# Altium PCB mikro.PcbDoc
Units mm, origin at the board's own origin, x right, y up, seen from the top; angles counter-clockwise.
Board outline 86.61 x 97.54 mm, 2 copper layers (Top Layer, Bottom Layer); 14 components, 16 nets, 76 pads, 2 vias.
Unrouted connection lines stored in the file: 1.
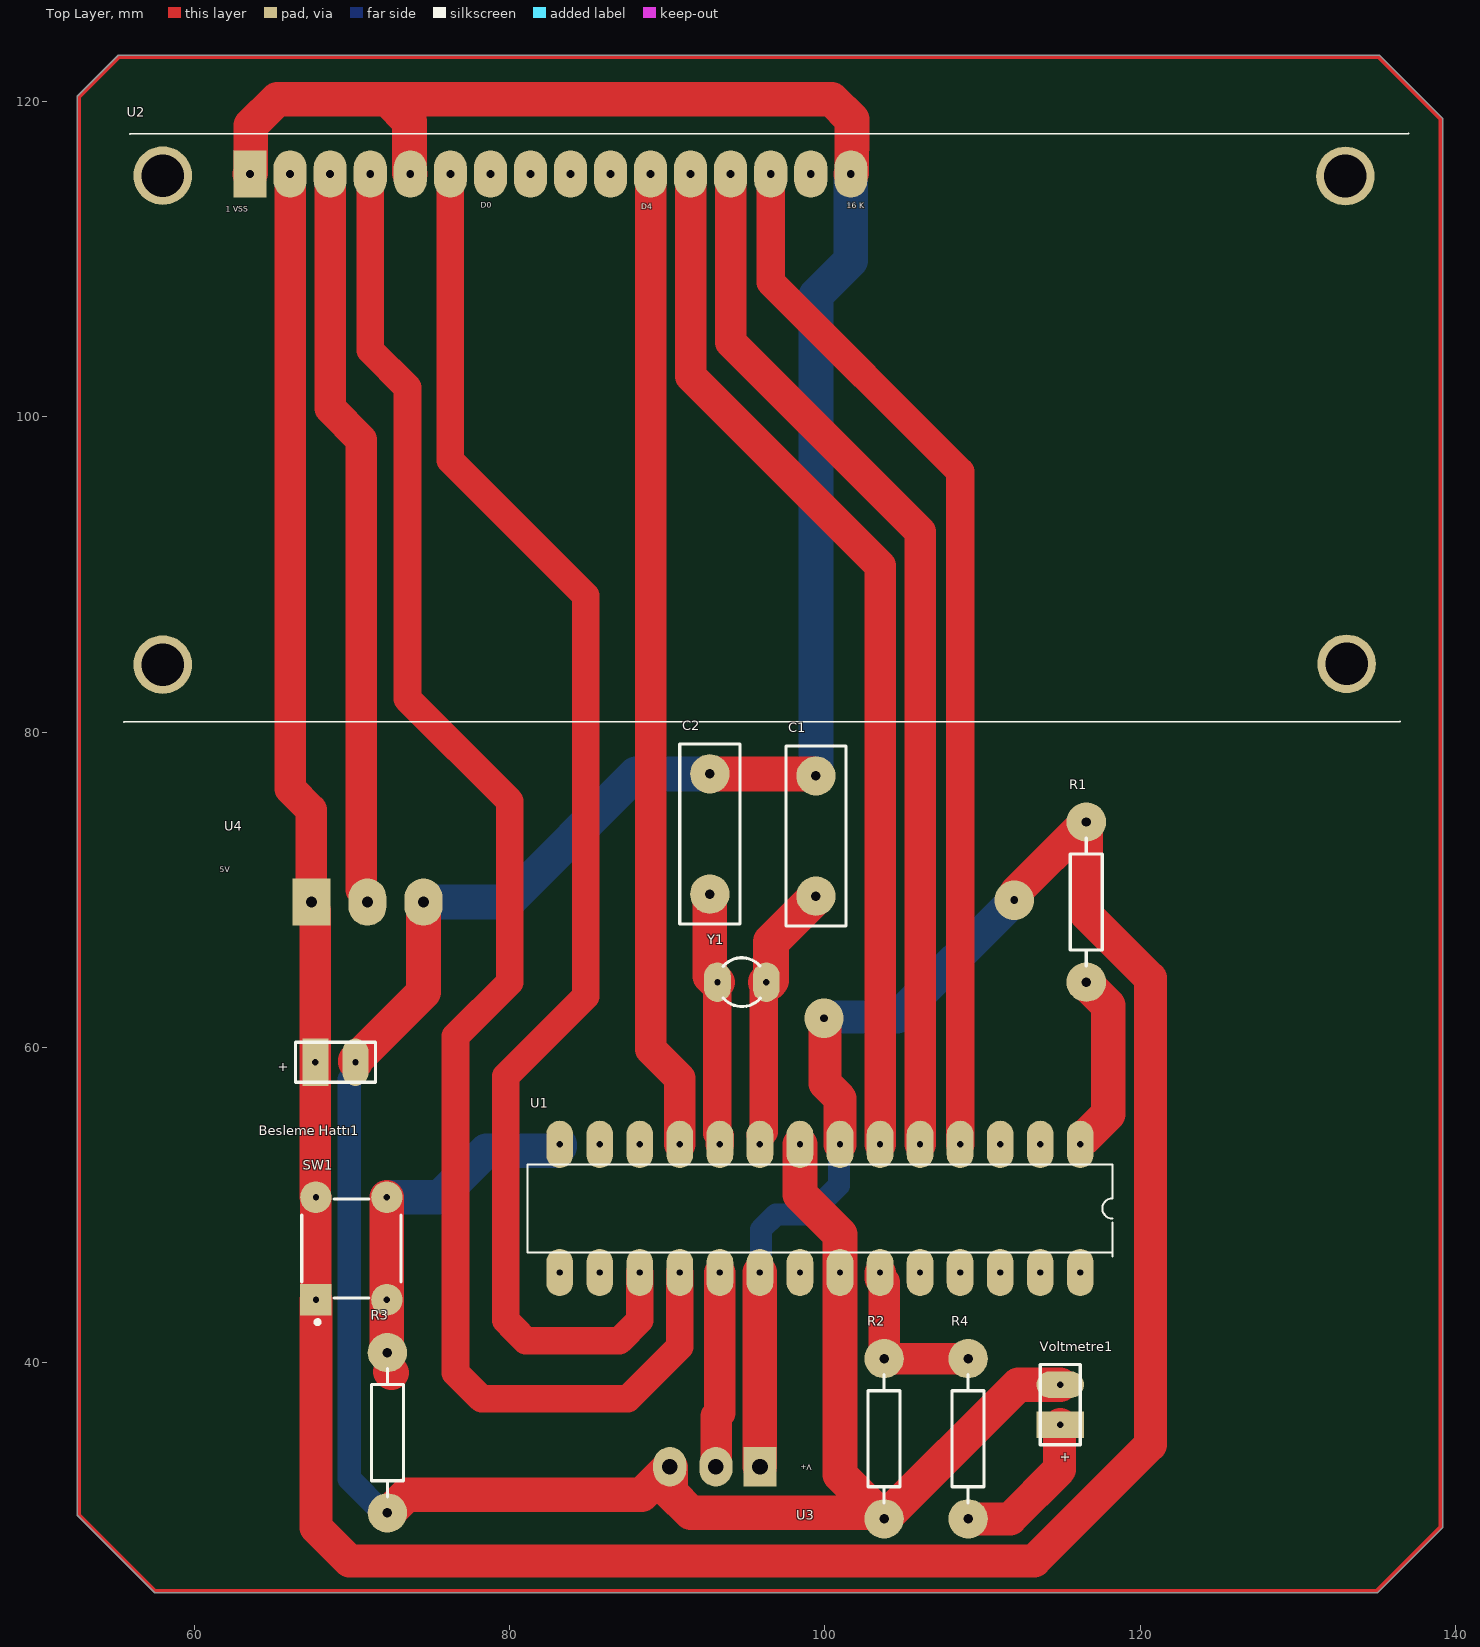
[diagram p0: Top Layer view]
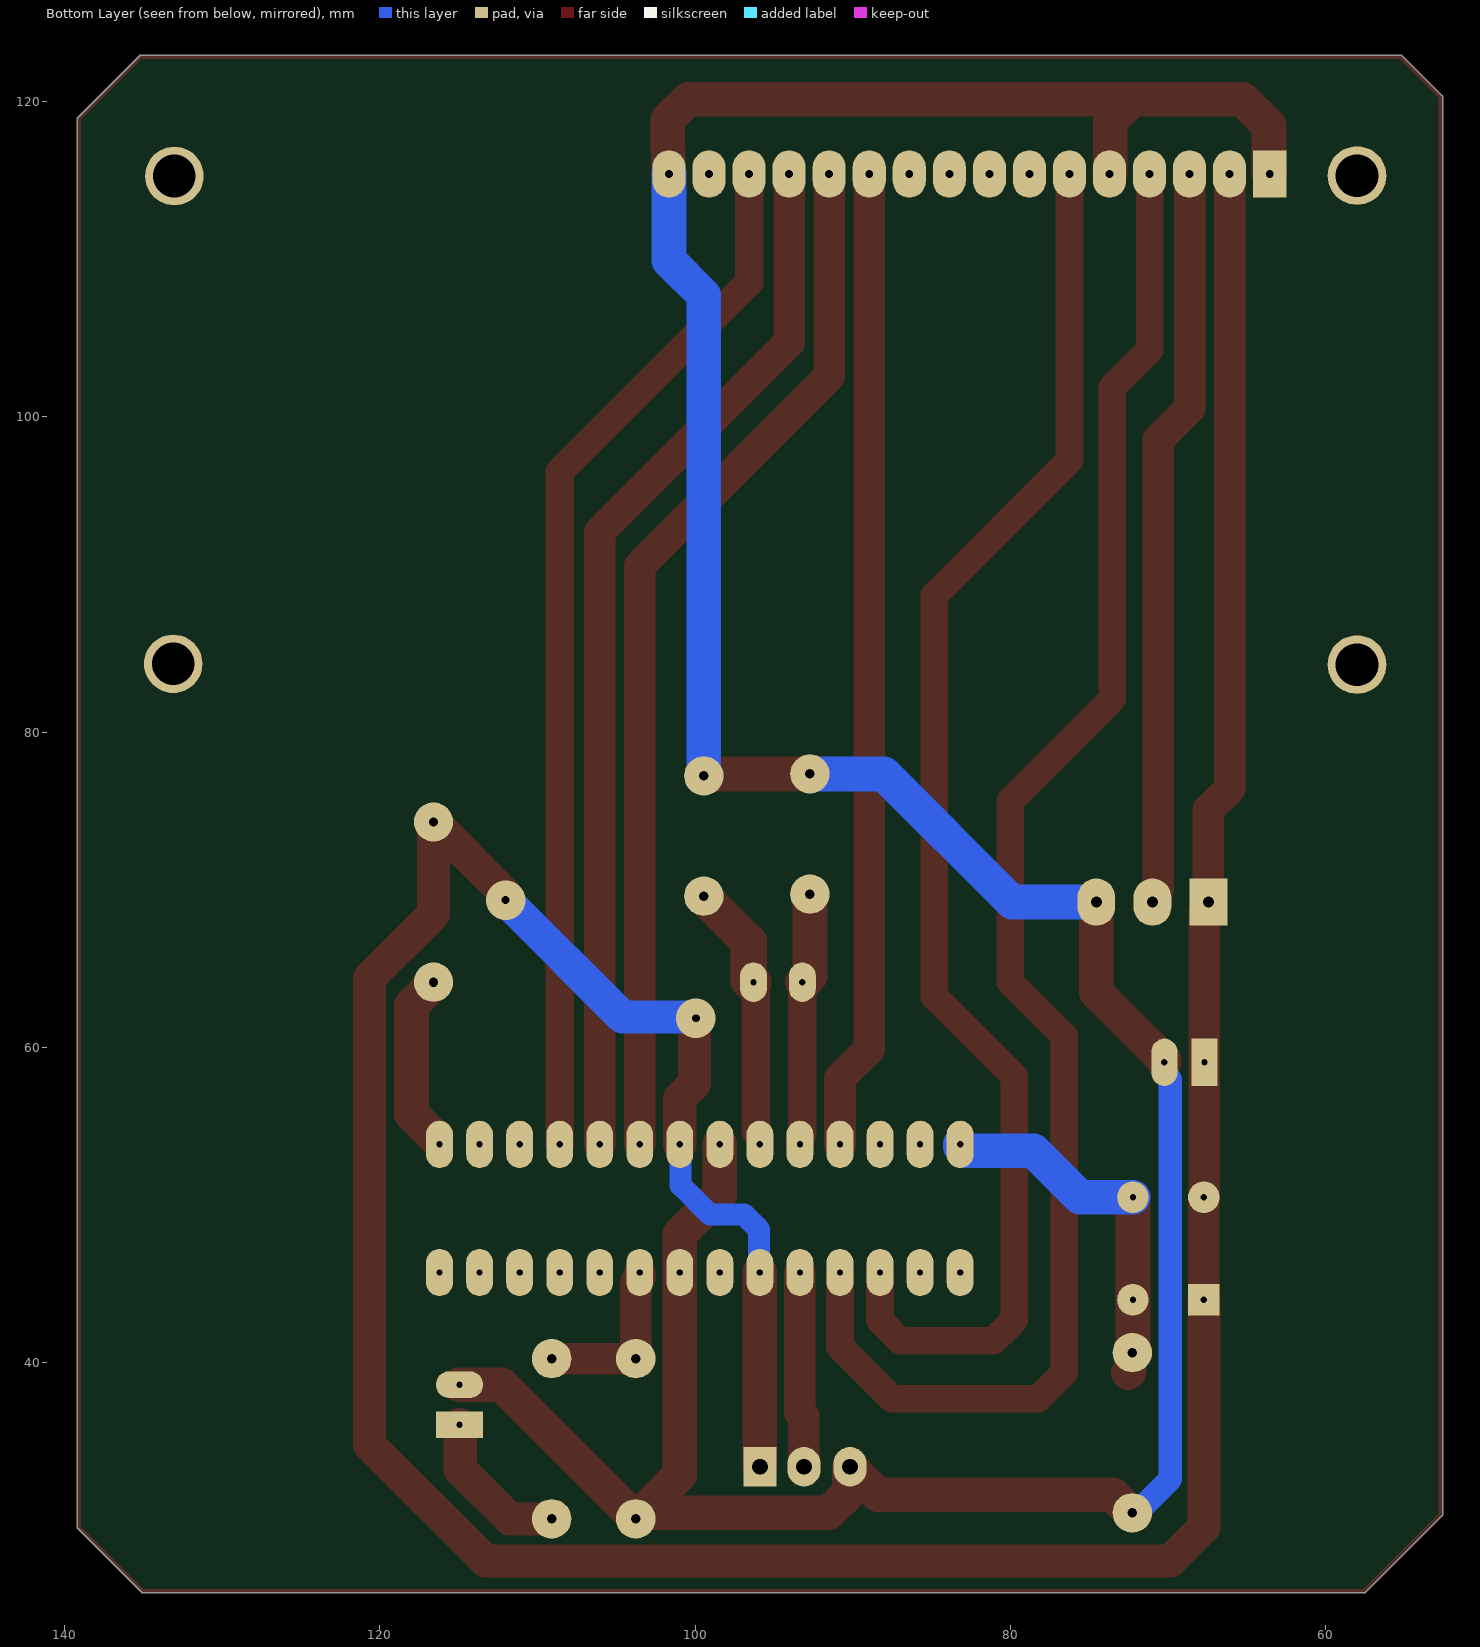
[diagram p1: Bottom Layer view, seen from below]

## Layer stack, top to bottom
Top Solder: solder mask 0.0102, Solder Resist, Dk 3.5
Top Layer: signal copper 0.0356
Dielectric 1: dielectric 0.32, FR-4, Dk 4.8
Bottom Layer: signal copper 0.0356
Bottom Solder: solder mask 0.0102, Solder Resist, Dk 3.5

## Board outline
52.578,30.353 cw(c52.705,30.353) 52.578,30.366 ccw(c52.705,30.378) 52.615,30.288 57.466,25.437 ccw(c57.556,25.527) 57.544,25.4 ccw(c57.556,25.527) 57.556,25.4 57.544,25.4 cw(c57.531,25.527) 57.531,25.4 135.001,25.4 ccw(c135.001,25.527) 135.092,25.437 135.091,25.437 139.155,29.501 139.155,29.5 ccw(c139.065,29.591) 139.192,29.591 139.192,118.872 ccw(c139.065,118.872) 139.155,118.963 139.155,118.962 135.218,122.899 135.219,122.899 ccw(c135.128,122.809) 135.128,122.936 55.246,122.936 ccw(c55.245,122.809) 55.245,122.936 135.128,122.936 55.246,122.936 55.245,122.936 ccw(c55.245,122.809) 55.154,122.899 ccw(c55.245,122.809) 55.154,122.898 55.155,122.899 52.615,120.359 55.155,122.899 52.743,120.487 ccw(c52.832,120.396) 52.742,120.487 ccw(c52.832,120.396) 52.742,120.486 ccw(c52.832,120.396) 52.741,120.486 ccw(c52.832,120.396) 52.741,120.485 52.616,120.36 ccw(c52.705,120.269) 52.615,120.36 ccw(c52.705,120.269) 52.578,120.269 ccw(c52.705,120.269) 52.578,120.269 ccw(c52.705,120.269) 52.578,120.269

## Design rules (kind name [scope] priority, off if disabled: settings)
Clearance [All] p1: gap=0.127 ignorepadtopadclearanceinfootprint=FALSE except(0: Arc-Hole Track-Hole SMDPad-Hole THPad-Hole Via-Hole Fill-Hole Poly-Hole Region-Hole Text-Hole)
HoleSize [All] p1: absolutevalues=TRUE maxlimit=4 minlimit=0.025 maxpercent=80.000 minpercent=20.000
HoleToHoleClearance [All] p1: gap=0.152 allowstackedmicrovias=TRUE
PolygonConnect [All] p1: connectstyle=Relief reliefconductorwidth=0.254 reliefentries=4 polygonreliefangle="90 Angle" airgapwidth=0.254
RoutingVias [All] p1: holewidth=0.711 width=1.27 viastyle="Through Hole" minholewidth=0.3 minwidth=0.3 maxholewidth=4 maxwidth=6
SolderMaskExpansion [All] p1: expansion=0.06 istentingtop=FALSE
Width [All] p1: maxlimit=6 minlimit=0.254 preferedwidth=3 minimp=50.000000 maximp=50.000000 favimp=50.000000
28 further rules are at their usual default settings.

## Components (designator, comment, footprint, x,y, rotation, side; value= is the part's Value field where it differs from the comment)
"Besleme Hattı1" "Battery" BAT-2#1 68.961,59.055 r0 top
C1 "22pF" RAD-0.3 99.441,73.406 r270 top
C2 "22pF" RAD-0.3 92.71,73.533 r270 top
R1 "res" AXIAL-0.4 116.586,69.215 r270 top value=10K
R2 "res" AXIAL-0.4 103.759,35.179 r270 top value=5K
R3 "res" AXIAL-0.4 72.263,35.56 r90 top value=330R
R4 "res" AXIAL-0.4 109.093,35.179 r90 top value=10K
SW1 "buton" FP-1825910-2-0 69.977,47.244 r90 top
U1 "atmega328p" atmega328p 99.568,49.784 r270 top
U2 "16x2 LCD" "16x2 LCD" 95.529,95.225 r0 top
U3 "DHT11" DHT11 93.472,33.401 r180 top
U4 "pot 10k" "pot 10k" 70.993,69.215 r0 top
Voltmetre1 "Volmetre" BAT-2#2 114.935,37.338 r90 top
Y1 "16MHz" R38 94.742,64.135 r270 top

## Footprints (in the part's own frame and the unit in brackets; to place one, negate y for a bottom-side part, rotate by r counter-clockwise, add the part's x,y. Pads: shape width x height; smd on the part's side, far side on the other; paste and mask are expansions set on the pad)
"16x2 LCD" [mm]
  rect 2.1x3 hole 0.5 mask+0.05: 1(-31.979,20.168)
  oval 2.1x3 hole 0.5 mask+0.05: 2(-29.439,20.168) 3(-26.899,20.168) 4(-24.359,20.168) 5(-21.819,20.168) 6(-19.279,20.168) 7(-16.739,20.168) 8(-14.199,20.168) 9(-11.659,20.168) 10(-9.119,20.168) 11(-6.579,20.168) 12(-4.039,20.168) 13(-1.499,20.168) 14(1.041,20.168) 15(3.581,20.168) 16(6.121,20.168)
  round 3.716 hole 2.7: 17(-37.516,20.066) 18(37.49,20.041) 19(-37.516,-10.947) 20(37.567,-10.897)
  silkscreen extent -39.98,-14.58 41.5,22.73, body extent -39.98,-13.45 40.02,22.55, height 10.6
atmega328p [mm]
  oval 3x1.7 hole 0.4: 1(-4.064,16.637) 2(-4.064,14.097) 3(-4.064,11.557) 4(-4.064,9.017) 5(-4.064,6.477) 6(-4.064,3.937) 7(-4.064,1.397) 8(-4.064,-1.143) 9(-4.064,-3.683) 10(-4.064,-6.223) 11(-4.064,-8.763) 12(-4.064,-11.303) 13(-4.064,-13.843) 14(-4.064,-16.383) 15(4.064,-16.383) 16(4.064,-13.843) 17(4.064,-11.303) 18(4.064,-8.763) 19(4.064,-6.223) 20(4.064,-3.683) 21(4.064,-1.143) 22(4.064,1.397) 23(4.064,3.937) 24(4.064,6.477) 25(4.064,9.017) 26(4.064,11.557) 27(4.064,14.097) 28(4.064,16.637)
  silkscreen extent -2.79,-18.41 3.05,18.67, body extent -5.08,-17.14 5.08,17.53, height 4.57
AXIAL-0.4 [mm] "Axial Device, Thru-Hole; 2 Leads; 0.4 in Pin Spacing"
  round 2.5 hole 0.6: 1(-5.08,0) 2(5.08,0)
  silkscreen extent -4.06,-1.02 4.06,1.02
BAT-2#1 [mm] "Battery; 2 Leads"
  rect 1.65x3 hole 0.4: 1(-1.27,0)
  oval 1.65x3 hole 0.4: 2(1.27,0)
  silkscreen extent -2.54,-1.27 2.54,1.27
BAT-2#2 [mm] "Battery; 2 Leads"
  rect 1.7x3 hole 0.4: 1(-1.27,0)
  oval 1.7x3 hole 0.4: 2(1.27,0)
  silkscreen extent -2.54,-1.27 2.54,1.27
DHT11 [mm]
  rect 2.1x2.5 hole 1: 1(-2.413,0)
  oval 2.1x2.5 hole 1: 2(0.381,0) 3(3.302,0)
  body extent -6.87,-6.8 7.63,1.72, height 4.33
FP-1825910-2-0 [mm]
  rect 2x2 hole 0.4 paste-1000 mask+0: 1(-3.25,2.25)
  round 2 hole 0.4 paste-1000 mask+0: 2(3.25,2.25) 3(-3.25,-2.25) 4(3.25,-2.25)
  silkscreen extent -4.79,-3.15 3.15,3.15, body extent -4.12,-3.24 4.12,3.24, height 0.25
"pot 10k" [mm]
  rect 2.4x3 hole 0.7: 1(-3.556,0)
  oval 2.4x3 hole 0.7: 2(0,0) 3(3.556,0)
R38 [mm] "Crystal, Thru-Hole; 2 Leads; Body 3.1 x 8.2 mm (Dia.xH)"
  oval 2.5x1.7 hole 0.4: 1(0,1.55) 2(0,-1.55)
  silkscreen extent -1.55,-1.19 1.55,1.17
RAD-0.3 [mm] "Radial Cap, Thru-Hole; 2 Leads; 0.3 in Pin Spacing"
  round 2.5 hole 0.6: 1(-3.81,0) 2(3.81,0)
  silkscreen extent -5.71,-1.91 5.71,1.91

## Part data
"Besleme Hattı1": "Multicell Battery", LatestRevisionDate=17-Jul-2002, LatestRevisionNote="Re-released for DXP Platform.", PackageDescription="Battery; 2 Leads", PackageReference=BAT-2, Published=24-Mar-1999, Publisher="Altium Limited"
C1 C2: library part Cap, "Capacitor", LatestRevisionDate=17-Jul-2002, LatestRevisionNote="Re-released for DXP Platform.", PackageDescription="Radial Cap, Thru-Hole; 2 Leads; 0.3 in Pin Spacing", PackageReference=RAD-0.3, Published=8-Jun-2000, Publisher="Altium Limited"
R1 R2 R3 R4: library part Res2, "Resistor", LatestRevisionDate=17-Jul-2002, LatestRevisionNote="Re-released for DXP Platform.", PackageDescription="Axial Device, Thru-Hole; 2 Leads; 0.4 in Pin Spacing", PackageReference=AXIAL-0.4, Published=8-Jun-2000, Publisher="Altium Limited"
SW1: library part CMP-03407-000004-1, "SWITCH TACTILE SPST-NO 0.05A 24V", Contact Current Rating=50mA, Contact Resistance=100mΩ, Manufacturer=TE, Manufacturer Part Number=1825910-2, Operating Force=160gf, Package=0, Temperature="-35°C to +85°C", Temperature Range High=+85°C, Temperature Range Low=-35°C, Voltage Rating Dc=24V, Automotive=No, Category=Switch, ComponentLink2Description=Datasheet, ComponentLink2URL=https://www.te.com/commerce/DocumentDelivery/DDEController?Action=showdoc&DocId=Customer+Drawing%7F1825910%7FC10%7Fpdf%7FEnglish%7FENG_CD_1825910_C10.pdf%7F1825910-2, Device Class L1=Electromechanical, Device Class L2=Switches, Device Class L3="Tactile Switches", Digikey Description="SWITCH TACTILE SPST-NO 0.05A 24V", Electromechanical Life=100000Cycles, Height=4.6mm, Lead Free=Yes, Mount="Through Hole", Octopart=https://octopart.com/1825910-2-te+connectivity-42270502, RoHS=TRUE, Throw Configuration=SPST-NO
U1: library part Atmega328p
Voltmetre1: library part Battery, "Volmetre ucları", LatestRevisionDate=17-Jul-2002, LatestRevisionNote="Re-released for DXP Platform.", PackageDescription="Battery; 2 Leads", PackageReference=BAT-2, Published=24-Mar-1999, Publisher="Altium Limited"
Y1: library part XTAL, "16MHZ Crystal Oscillator", LatestRevisionDate=17-Jul-2002, LatestRevisionNote="Re-released for DXP Platform.", PackageDescription="Crystal, Thru-Hole; 2 Leads; Body 3.1 x 8.2 mm (Dia.xH)", PackageReference=R38, Published=8-Jun-2000, Publisher="Altium Limited"

## Via types
v1: diameter 2.5, hole 0.5, Top Layer to Bottom Layer, 2 vias

## Nets (pads, with @x,y where several pads share a name; then routed paths per layer and width w, separated by ;. In a path a pad name is that pad's centre, name@x,y a point inside that pad or via, vN(x,y) a via of type N, cw(c..) or ccw(c..) an arc to the next point about the centre after c; other vN are vias at no path point)
+5: "Besleme Hattı1.1" R1.1 SW1.1 SW1.2 U1.7 U1.20 U2.2 U2.15 U3.1 U4.1 | length 238.8
  Top Layer w2: U2.2 66.091,76.403 67.437,75.057 U4.1 67.437,68.915 67.691,68.661 67.691,59.055 67.691,50.53 SW1.2 SW1.1
  Top Layer w2.1: SW1.1 67.727,29.555 69.85,27.432 113.284,27.432 120.65,34.798 120.65,64.389 116.586,68.453 R1.1 112.091,69.8 112.091,69.419 v1(112.014,69.342) ; v1(99.949,61.849) 100.026,61.772 100.026,57.708 100.965,56.769 U1.7
  Top Layer w2.2: U3.1 U1.20
  Bottom Layer w1.4: U1.20 95.942,45.777 95.942,48.444 96.901,49.403 99.06,49.403 100.908,51.251 100.908,53.791 U1.7
  Bottom Layer w2.1: v1(99.949,61.849) 100.026,61.926 104.598,61.926 v1(112.014,69.342)
ButonPin: R3.2 SW1.3 SW1.4 U1.14 | length 22.4
  Top Layer w2.2: SW1.4 SW1.3 72.227,40.676 R3.2 ; R3.2@72.46,39.427 72.517,39.37
  Bottom Layer w2.2: SW1.4 75.581,50.494 78.535,53.448 82.935,53.448 83.185,53.698 U1.14
DHT: U1.19 U3.2 | length 12.4
  Top Layer w2: U3.2 93.11,33.42 93.11,36.595 93.345,36.83 U1.19
GND: "Besleme Hattı1.2" C1.1 C2.1 R2.2 R3.1 U1.8 U1.22 U2.1 U2.5 U2.16 U3.3 U4.3 Voltmetre1.2 | length 236.3
  Top Layer w2.2: U2.1 63.601,115.442 63.601,118.465 65.278,120.142 72.244,120.142 ; 70.231,59.055 70.231,59.18 74.549,63.498 U4.3 ; R3.1 72.344,30.48 73.487,31.623 88.392,31.623 90.02,33.251 90.12,33.251 90.17,33.301 U3.3 90.22,33.351 90.22,31.769 91.509,30.48 103.297,30.48 103.678,30.099 R2.2 ; U2.5 73.661,115.442 73.661,118.725 72.244,120.142 ; C2.1 99.233,77.343 99.36,77.216 C1.1 ; U1.8 98.425,50.673 100.965,48.133 U1.22 100.965,32.893 R2.2 ; U2.16 101.701,115.442 101.701,117.005 101.727,117.031 101.727,118.853 100.438,120.142 72.244,120.142 ; Voltmetre1.2 112.268,38.608 R2.2
  Bottom Layer w1.5: 70.231,59.055 70.231,58.339 69.85,57.958 69.85,32.622 71.992,30.48 R3.1
  Bottom Layer w2.2: U4.3 79.883,69.215 88.011,77.343 C2.1 ; C1.1 99.441,107.696 101.651,109.906 U2.16
"LCD D4": U1.11 U2.11 | length 62.3
  Top Layer w2: U2.11 88.951,59.893 90.805,58.039 U1.11
"LCD D5": U1.6 U2.12 | length 66.5
  Top Layer w2: U2.12 91.491,102.565 103.505,90.551 U1.6
"LCD D6": U1.5 U2.13 | length 66.5
  Top Layer w2: U2.13 94.031,104.724 106.045,92.71 U1.5
"LCD D7": U1.4 U2.14 | length 66.5
  Top Layer w1.8: U2.14 96.571,108.534 108.585,96.52 U1.4
"LCD EN": U1.17 U2.6 | length 91
  Top Layer w1.75: U2.6 76.251,97.231 84.836,88.646 84.836,63.246 79.756,58.166 79.756,42.691 80.273,42.173 81.045,41.402 86.976,41.402 88.265,42.691 U1.17
"LCD RS": U1.18 U2.4 | length 102.1
  Top Layer w1.75: U2.4 71.171,104.216 73.533,101.854 73.533,82.1 80.01,75.623 80.01,64.135 76.581,60.706 76.581,39.37 78.232,37.719 87.503,37.719 90.805,41.021 U1.18
NetC1_2: C1.2 U1.9 Y1.1 | length 16.7
  Top Layer w1.8: U1.9@95.935,54.448 96.139,54.652 96.139,63.682 96.242,63.785 96.242,64.085 Y1.1
  Top Layer w2.3: Y1.1 96.492,64.135 96.592,64.235 96.592,66.693 99.441,69.542 C1.2
NetC2_2: C2.2 U1.10 Y1.2 | length 16.2
  Top Layer w1.8: Y1.2 93.192,54.551 93.345,54.398 U1.10
  Top Layer w2.2: C2.2 92.71,64.517 93.092,64.135 Y1.2
NetR1_2: R1.2 U1.1 | length 11.1
  Top Layer w2.2: U1.1@116.455,54.248 117.983,55.776 117.983,62.657 116.586,64.054 R1.2
NetR2_1: R2.1 R4.2 U1.23 | length 11
  Top Layer w2: U1.23 103.505,45.37 103.759,45.116 R2.1 R4.2 R4.2@109.029,40.322
NetU2_3: U2.3 U4.2 | length 47.2
  Top Layer w2: U2.3 68.631,100.533 70.612,98.552 70.612,70.004 70.993,69.623 U4.2
Poz+: R4.1 Voltmetre1.1 | length 10
  Top Layer w2.1: R4.1 111.76,30.099 114.888,33.227 114.888,36.021 Voltmetre1.1
pads on no net: U1.2 U1.3 U1.12 U1.13 U1.15 U1.16 U1.21 U1.24 U1.25 U1.26 U1.27 U1.28 U2.7 U2.8 U2.9 U2.10 U2.17 U2.18 U2.19 U2.20
copper on no net: | length 358.3
  Top Layer w0.254: 52.705,30.353 57.531,25.527 135.001,25.527 139.065,29.591 139.065,118.872 135.128,122.809 55.245,122.809 52.832,120.396 52.705,120.269 52.705,119.634 52.705,30.353

## Silkscreen, mask and mechanical layers (free items; w line width, h text height)
Mechanical 1:
  lines w0.254: 52.705,30.378 57.556,25.527 135.001,25.527 139.065,29.591 139.065,118.872 135.128,122.809 55.245,122.809 52.705,120.269 52.705,30.378

## Text inside footprints (layer, text, board x,y; h text height)
"Besleme Hattı1": Top Overlay "+" at 65.291,58.478 h0.6
U2: Top Overlay "D4" at 88.367,113.03 h0.6; Top Overlay "D0" at 78.181,113.113 h0.6; Top Overlay "16 K" at 101.397,113.087 h0.6; Top Overlay "1 VSS" at 62.001,112.884 h0.6
U3: Top Overlay "V+" at 99.186,33.655 h0.6 r180
U4: Top Overlay "5V" at 61.637,70.993 h0.6
Voltmetre1: Top Overlay "+" at 115.512,33.668 h0.6 r90